# Altium PCB PCB1.PcbDoc
Units mm, origin at the board's own origin, x right, y up, seen from the top; angles counter-clockwise.
Board outline 97.5 x 97.5 mm, 2 copper layers (Top Layer, Bottom Layer); 67 components, 71 nets, 269 pads, 55 vias.
Unrouted connection lines stored in the file: 4.
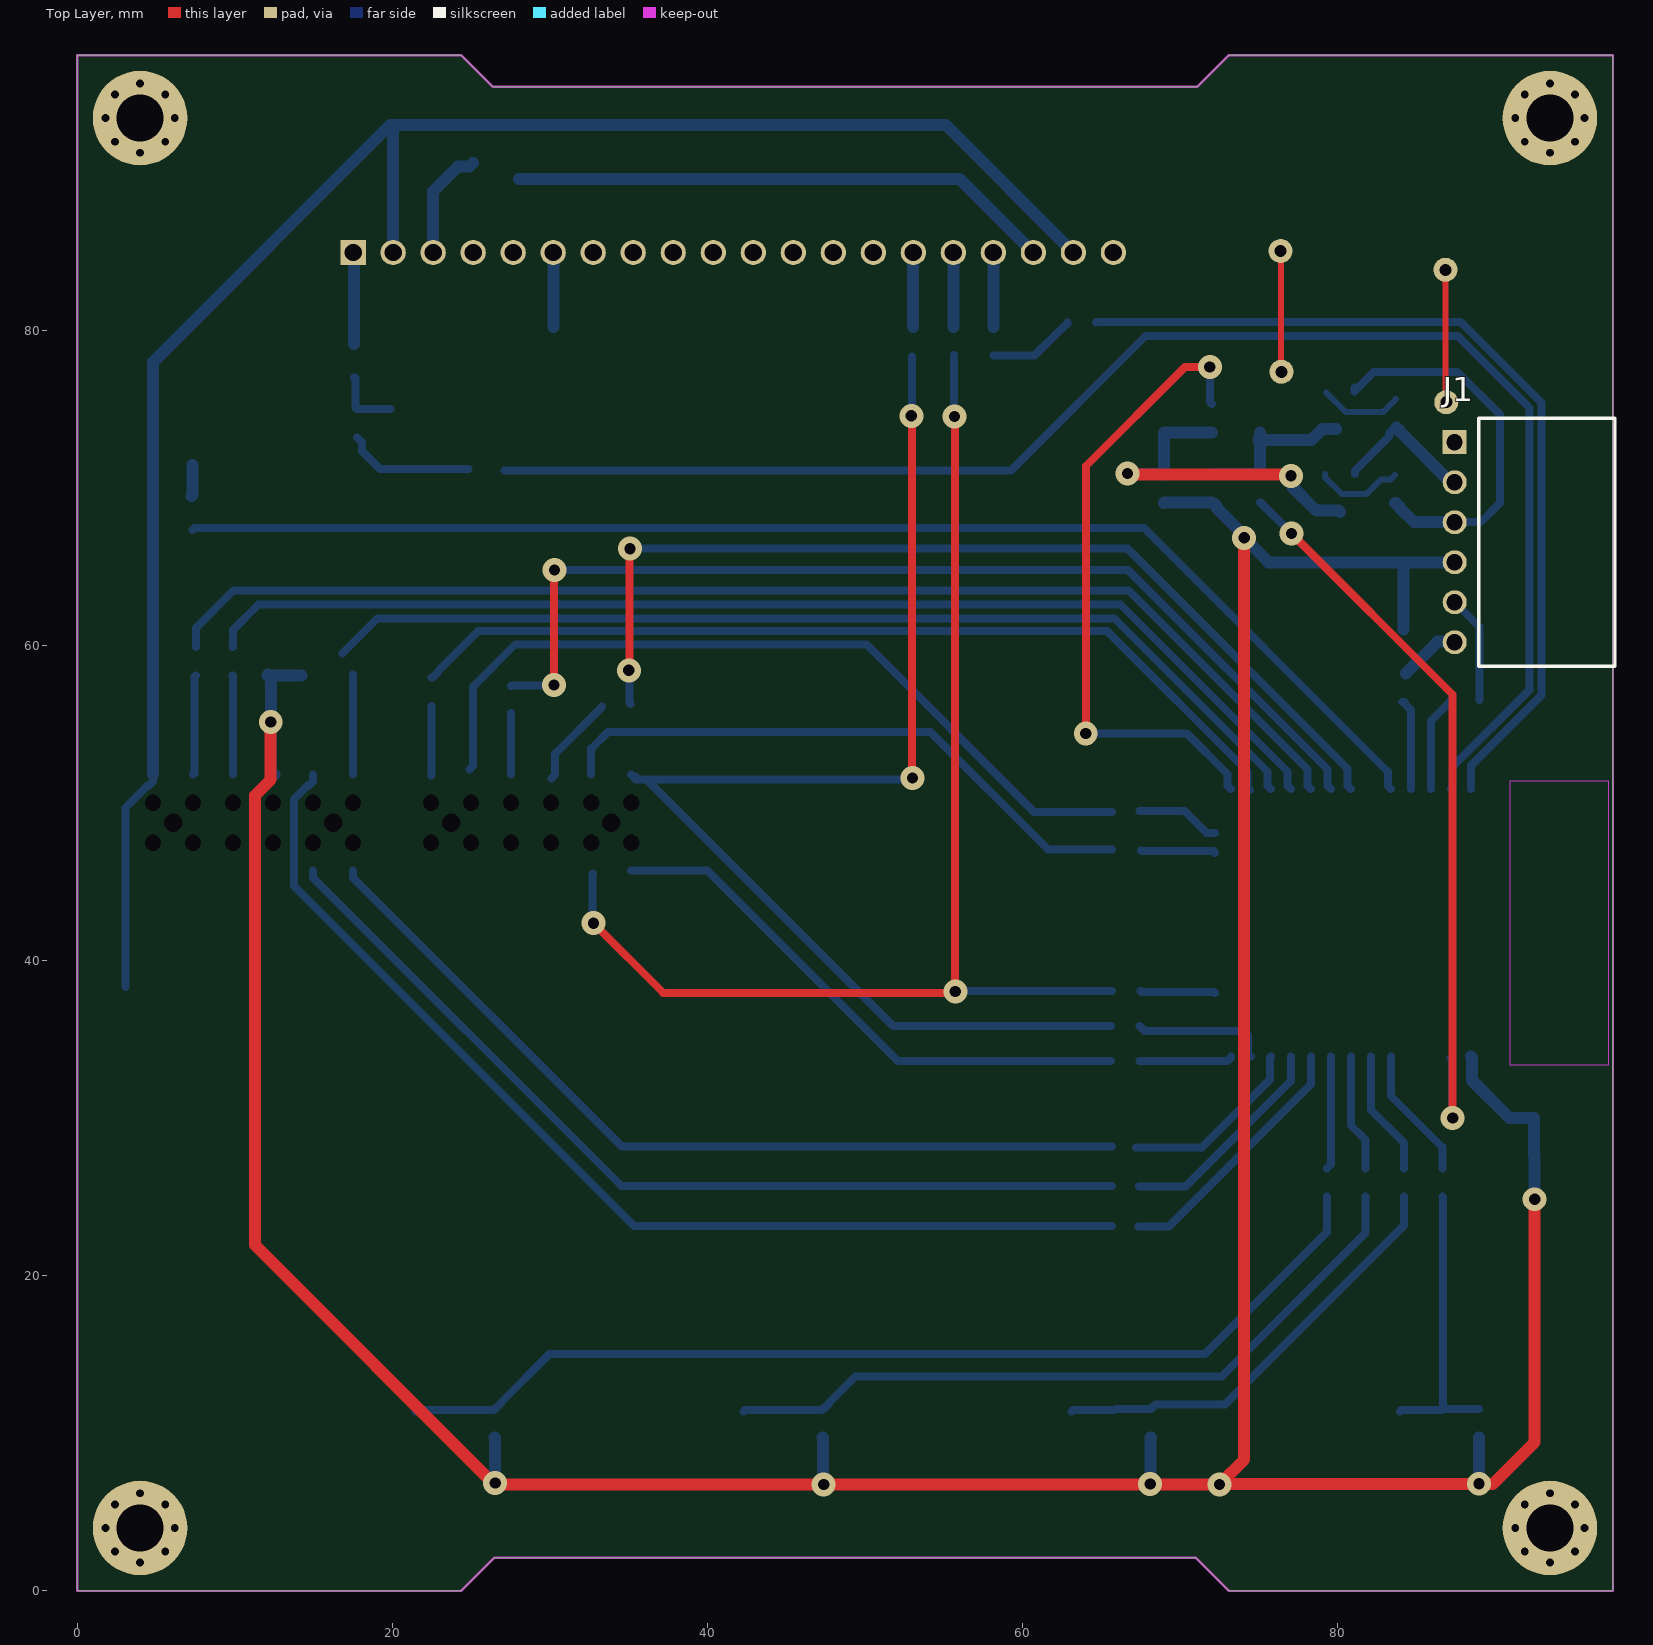
[diagram p0: Top Layer view]
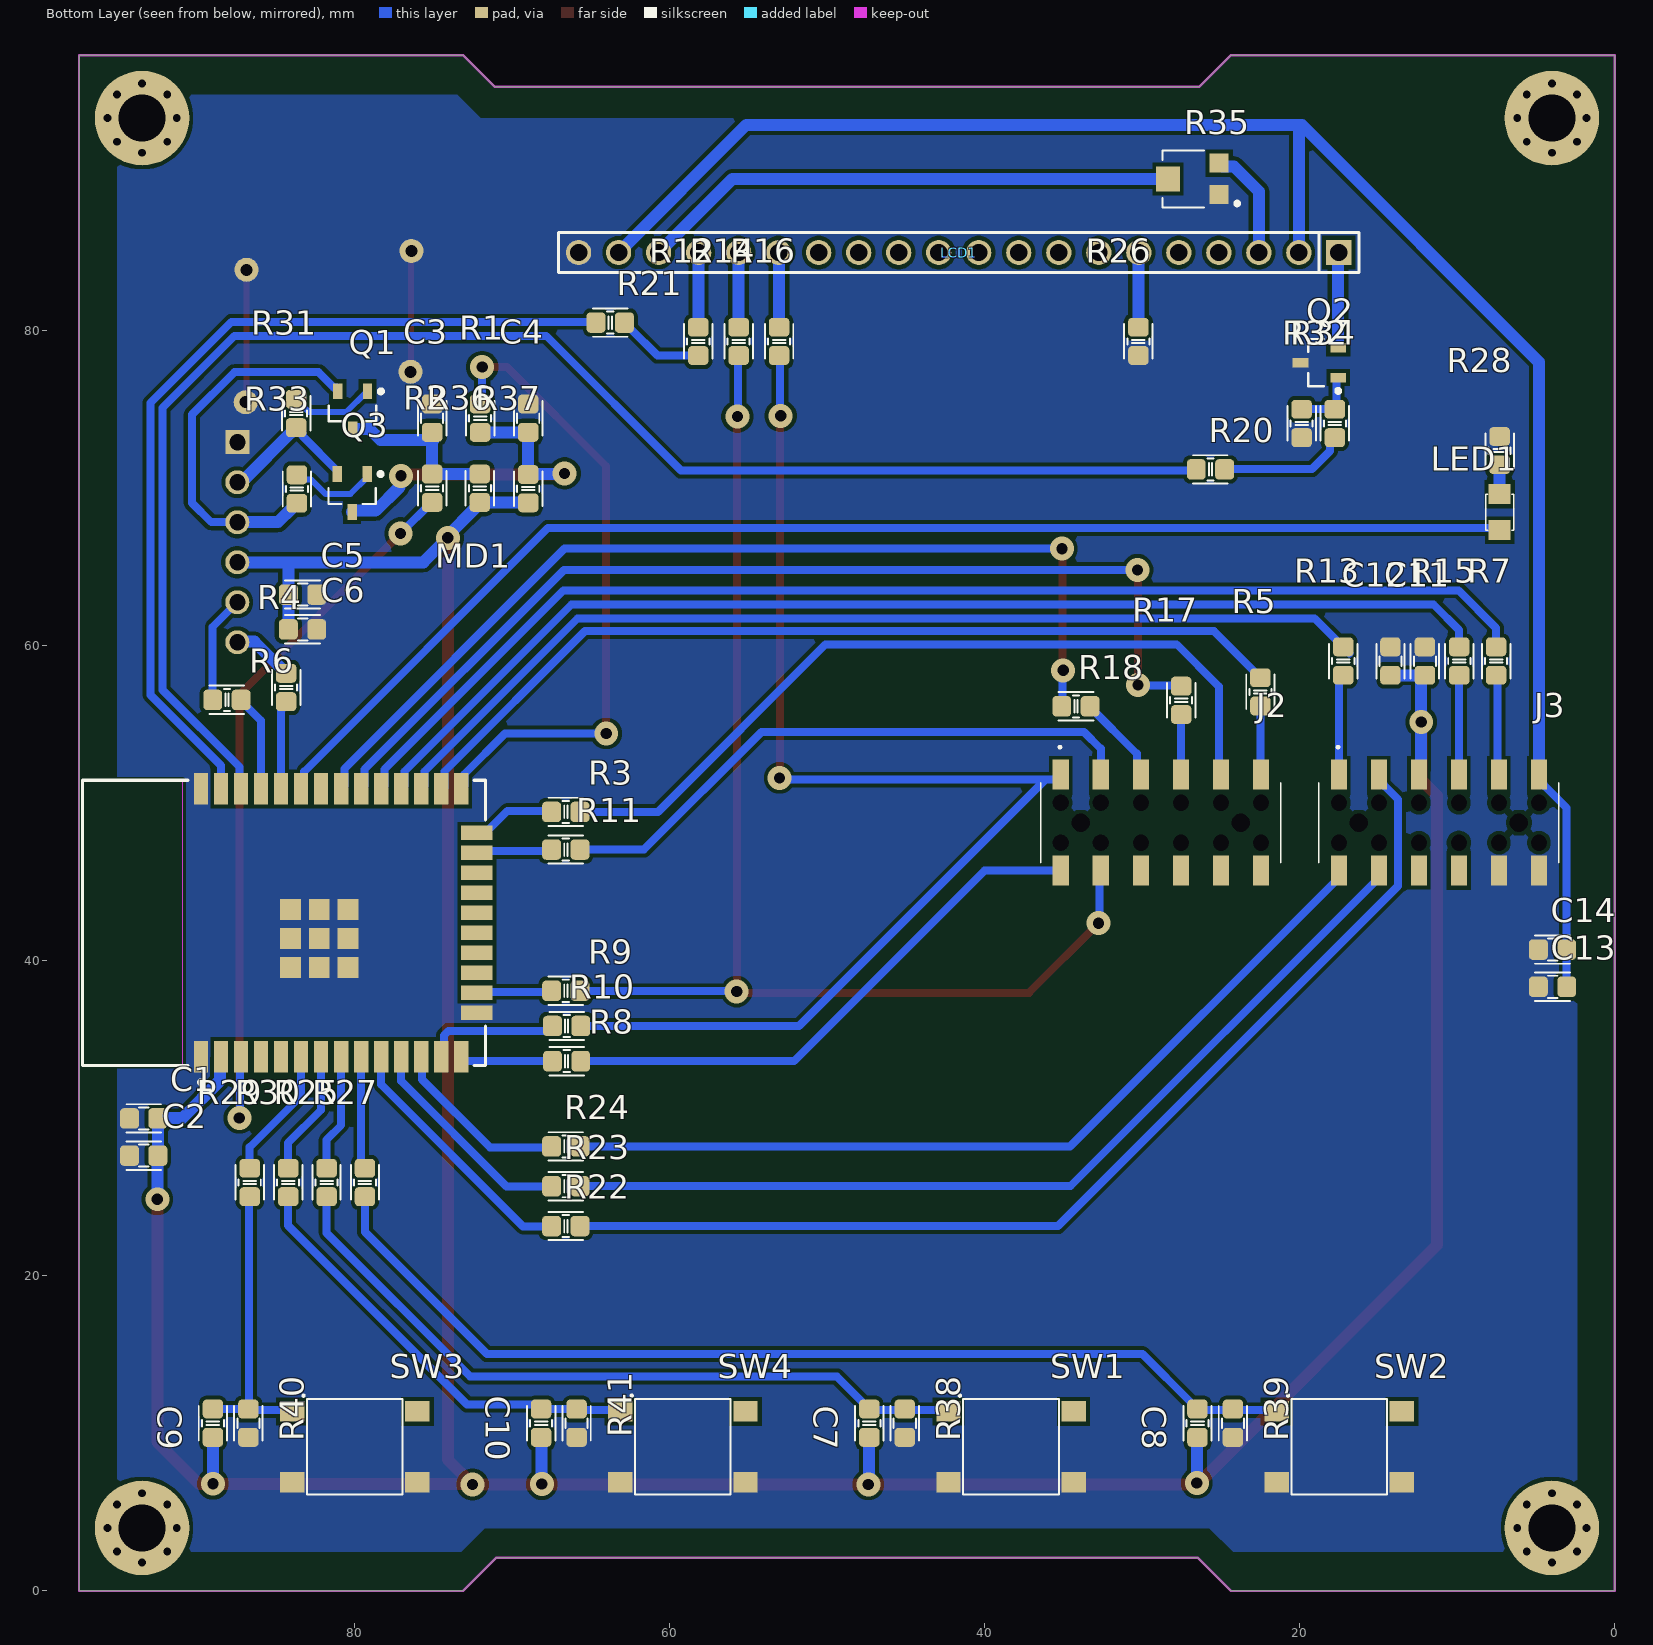
[diagram p1: Bottom Layer view, seen from below]
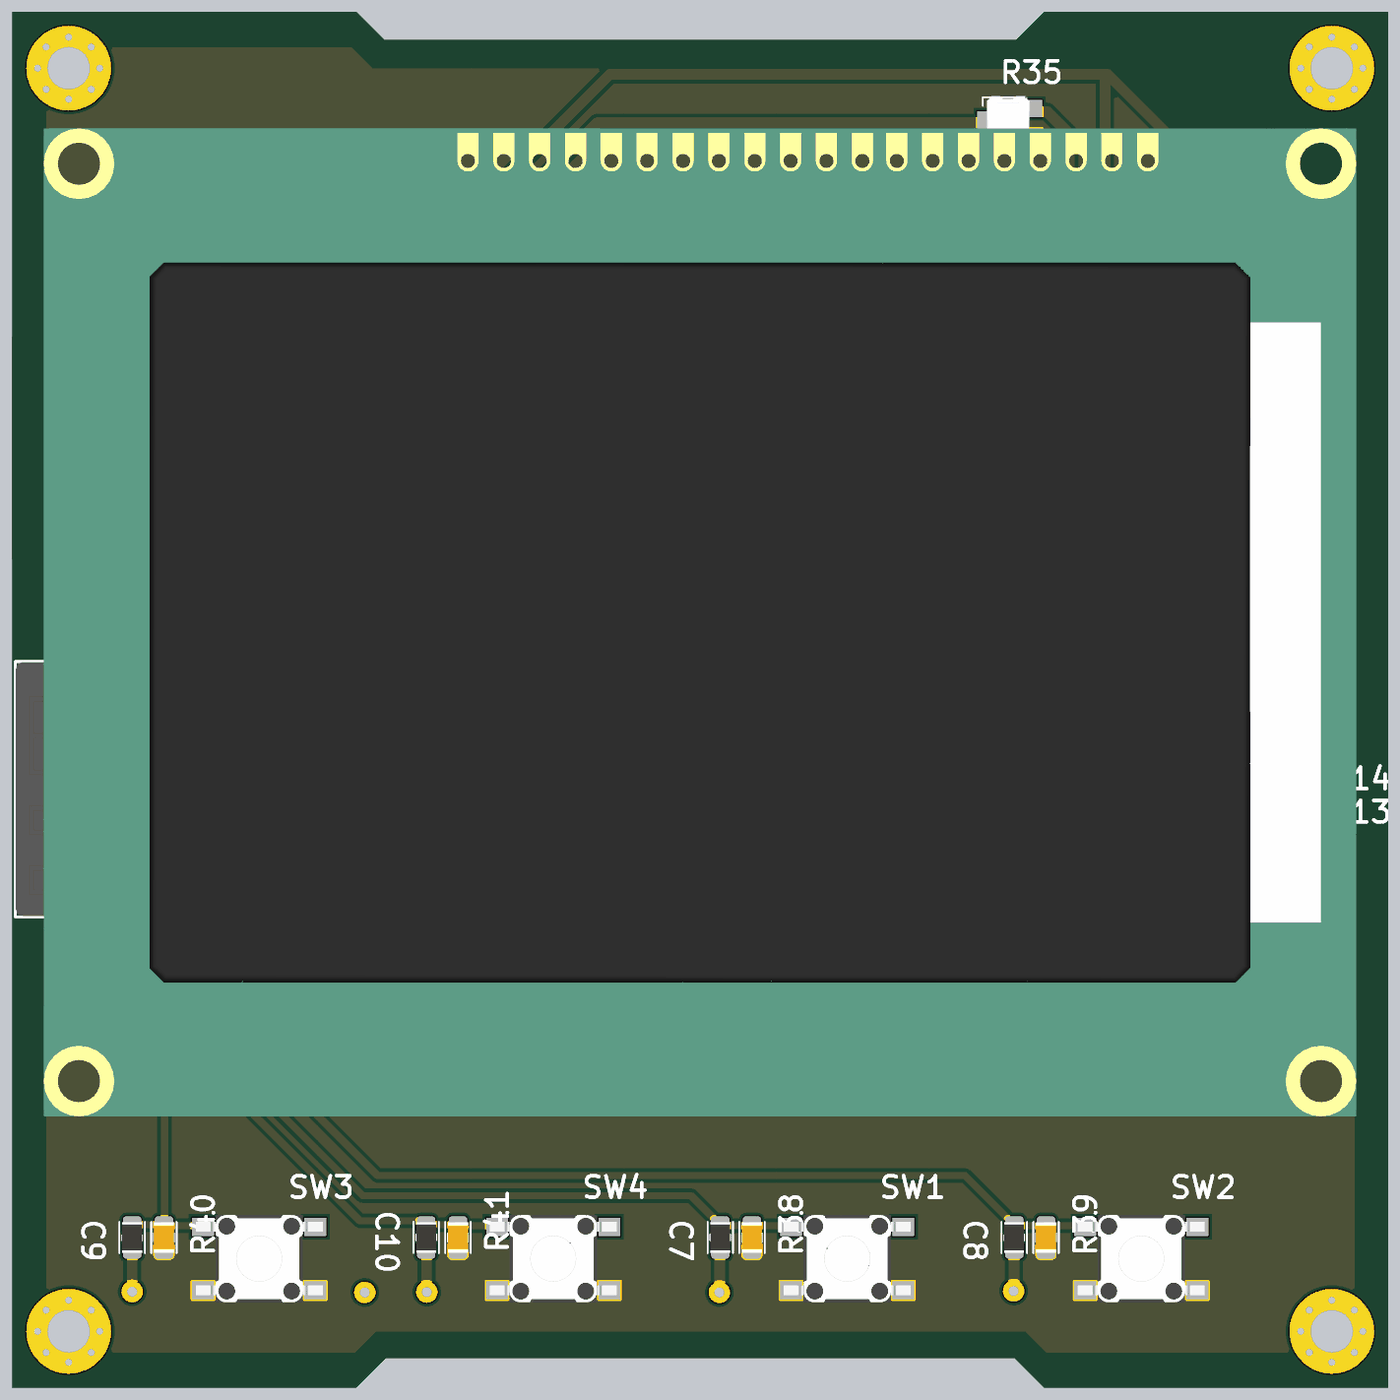
[diagram p2: 3D render of the assembled board from below, using the file's embedded part models]

## Layer stack, top to bottom
Top Solder: solder mask 0.0102, Solder Resist, Dk 3.5
Top Layer: signal copper 0.0356
Dielectric 1: dielectric 0.32, FR-4, Dk 4.8
Bottom Layer: signal copper 0.0356
Bottom Solder: solder mask 0.0102, Solder Resist, Dk 3.5

## Board outline
0,0 0,50 0,97.5 24.375,97.5 26.375,95.5 71.125,95.5 73.125,97.5 97.5,97.5 97.5,47.5 97.5,0 73.125,0 71.025,2.1 26.475,2.1 24.375,0

## Design rules (kind name [scope] priority, off if disabled: settings)
Clearance [All] p1: gap=0.254 ignorepadtopadclearanceinfootprint=FALSE
PolygonConnect [All] p1: connectstyle=Direct reliefconductorwidth=0.254 reliefentries=4 polygonreliefangle="90 Angle" airgapwidth=0.254
RoutingVias [All] p1: holewidth=0.711 width=1.27 viastyle="Through Hole" minholewidth=0.711 minwidth=1.27 maxholewidth=0.711 maxwidth=1.27
SolderMaskExpansion [All] p1: expansion=0.102 istentingtop=FALSE
SupplyNets "Schematic Supply Nets_2" [InNet('GND')] p1: voltage=0.000
SupplyNets "Schematic Supply Nets_1" [InNet('+3.3V')] p2: voltage=0.000
SupplyNets "Schematic Supply Nets" [InNet('+5V')] p3: voltage=0.000
Width [All] p1: maxlimit=1.27 minlimit=0.254 preferedwidth=0.508
30 further rules are at their usual default settings.

## Components (designator, comment, footprint, x,y, rotation, side; value= is the part's Value field where it differs from the comment)
C1 "4.7u/6.3V" CAP_C_2012X110 93.396,29.997 r180 bottom
C2 "0.1u/6.3V" CAP_C_2012X110 93.396,27.635 r180 bottom
C3 "0.1u/6.3V" CAP_C_2012X110 75.082,74.447 r270 bottom
C4 "0.1u/6.3V" CAP_C_2012X110 68.986,74.447 r270 bottom
C5 "10u/6.3V" CAP_C_2012X110 83.312,63.254 r0 bottom
C6 "0.1u/6.3V" CAP_C_2012X110 83.312,61.042 r0 bottom
C7 "0.1u/6.3V" CAP_C_2012X110 45.083,10.65 r90 bottom
C8 "0.1u/6.3V" CAP_C_2012X110 24.25,10.65 r90 bottom
C9 "0.1u/6.3V" CAP_C_2012X110 86.75,10.65 r90 bottom
C10 "0.1u/6.3V" CAP_C_2012X110 65.916,10.65 r90 bottom
C11 "10u/6.3V" CAP_C_2012X110 12.065,59.03 r270 bottom
C12 "0.1u/6.3V" CAP_C_2012X110 14.249,59.03 r270 bottom
C13 "10u/6.3V" CAP_C_2012X110 3.96,38.354 r180 bottom
C14 "0.1u/6.3V" CAP_C_2012X110 3.96,40.716 r180 bottom
J1 "JP6" JP6-C1C 87.452,66.573 r270 top
J2 "SSM-106-S-DV" SSM-106-XXX-DV-BE 28.829,48.768 r0 bottom
J3 "SSM-106-S-DV" SSM-106-XXX-DV-BE 11.176,48.768 r0 bottom
LCD1 "DISPLAY_LCDGRAP" LCD_GRAP_20PIN 48.768,54.229 r270 bottom locked
LED1 "LED" LED-0805-Blue 7.315,67.335 r90 bottom value="LED 3 - 5 ly 2 Colour"
MD1 "ESP32-WROOM-32" FP-ESP32-WROOM-32-MFG 84.49,42.415 r90 bottom
Q1 "BC817W" SOT95P237X112-3N 80.137,74.952 r270 bottom
Q2 "BC817W" SOT95P237X112-3N 18.767,77.978 r0 bottom
Q3 "BC817W" SOT95P237X112-3N 80.162,69.701 r270 bottom
R1 "33R/1%" RES_C_2012X65 72.034,74.447 r270 bottom
R2 "33R/1%" RES_C_2012X65 75.082,70.002 r90 bottom
R3 "33R/1%" RES_C_2012X65 66.599,49.454 r180 bottom
R4 "33R/1%" RES_C_2012X65 84.353,57.353 r90 bottom
R5 "33R/1%" RES_C_2012X65 22.504,57.074 r270 bottom
R6 "33R/1%" RES_C_2012X65 88.113,56.566 r0 bottom
R7 "33R/1%" RES_C_2012X65 7.544,59.03 r270 bottom
R8 "33R/1%" RES_C_2012X65 66.548,33.63 r180 bottom
R9 "33R/1%" RES_C_2012X65 66.599,38.1 r180 bottom
R10 "33R/1%" RES_C_2012X65 66.548,35.865 r180 bottom
R11 "33R/1%" RES_C_2012X65 66.599,47.066 r180 bottom
R12 "0R/1%" RES_C_2012X65 58.191,79.324 r270 bottom
R13 "33R/1%" RES_C_2012X65 17.247,59.03 r270 bottom
R14 "0R/1%" RES_C_2012X65 55.626,79.324 r270 bottom
R15 "33R/1%" RES_C_2012X65 9.881,59.03 r270 bottom
R16 "0R/1%" RES_C_2012X65 53.061,79.324 r270 bottom
R17 "33R/1%" RES_C_2012X65 27.534,56.54 r270 bottom
R18 "33R/1%" RES_C_2012X65 34.214,56.159 r180 bottom
R20 "33R/1%" RES_C_2012X65 25.679,71.196 r180 bottom
R21 "33R/1%" RES_C_2012X65 63.779,80.518 r180 bottom
R22 "33R/1%" RES_C_2012X65 66.599,23.165 r180 bottom
R23 "33R/1%" RES_C_2012X65 66.599,25.692 r180 bottom
R24 "33R/1%" RES_C_2012X65 66.599,28.219 r180 bottom
R25 "33R/1%" RES_C_2012X65 81.788,25.933 r270 bottom
R26 "0R/1%" RES_C_2012X65 30.251,79.324 r270 bottom
R27 "33R/1%" RES_C_2012X65 79.35,25.933 r270 bottom
R28 "750R/1%" RES_C_2012X65 7.315,72.39 r90 bottom
R29 "33R/1%" RES_C_2012X65 86.665,25.933 r270 bottom
R30 "33R/1%" RES_C_2012X65 84.226,25.933 r270 bottom
R31 "10K/1%" RES_C_2012X65 83.718,74.752 r270 bottom
R32 "1K/1%" RES_C_2012X65 17.78,74.117 r90 bottom
R33 "10K/1%" RES_C_2012X65 83.668,69.952 r90 bottom
R34 "5.1K/1%" RES_C_2012X65 19.888,74.117 r90 bottom
R35 "20K" TRIM_TC33X-2-103E 26.924,89.637 r0 bottom
R36 "5.1K/1%" RES_C_2012X65 72.06,70.002 r270 bottom
R37 "5.1K/1%" RES_C_2012X65 68.986,69.977 r270 bottom
R38 "5.1K/1%" RES_C_2012X65 47.333,10.65 r270 bottom
R39 "5.1K/1%" RES_C_2012X65 26.5,10.65 r270 bottom
R40 "5.1K/1%" RES_C_2012X65 89,10.65 r270 bottom
R41 "5.1K/1%" RES_C_2012X65 68.167,10.65 r270 bottom
SW1 "" SW2-SMD 38.333,9.15 r180 bottom value="SW chip 2 pin"
SW2 "" SW2-SMD 17.5,9.15 r180 bottom value="SW chip 2 pin"
SW3 "" SW2-SMD 80,9.15 r180 bottom value="SW chip 2 pin"
SW4 "" SW2-SMD 59.167,9.15 r180 bottom value="SW chip 2 pin"

## Footprints (in the part's own frame and the unit in brackets; to place one, negate y for a bottom-side part, rotate by r counter-clockwise, add the part's x,y. Pads: shape width x height; smd on the part's side, far side on the other; paste and mask are expansions set on the pad)
CAP_C_2012X110 [mm] "Chip Capacitor, 2-Leads, Body 2.00x1.25mm, IPC High Density"
  rrect41% 1.2x1.3 smd: 1(-0.9,0) 2(0.9,0)
  silkscreen extent -1.1,-0.9 1.1,0.9, body extent -1.1,-0.72 1.1,0.72, height 1.1
FP-ESP32-WROOM-32-MFG [mm]
  rect 2x0.9 smd paste+0 mask+0: 1(-8.5,5.26) 2(-8.5,3.99) 3(-8.5,2.72) 4(-8.5,1.45) 5(-8.5,0.18) 6(-8.5,-1.09) 7(-8.5,-2.36) 8(-8.5,-3.63) 9(-8.5,-4.9) 10(-8.5,-6.17) 11(-8.5,-7.44) 12(-8.5,-8.71) 13(-8.5,-9.98) 14(-8.5,-11.25) 25(8.5,-11.25) 26(8.5,-9.98) 27(8.5,-8.71) 28(8.5,-7.44) 29(8.5,-6.17) 30(8.5,-4.9) 31(8.5,-3.63) 32(8.5,-2.36) 33(8.5,-1.09) 34(8.5,0.18) 35(8.5,1.45) 36(8.5,2.72) 37(8.5,3.99) 38(8.5,5.26)
  rect 0.9x2 smd paste+0 mask+0: 15(-5.715,-12.25) 16(-4.445,-12.25) 17(-3.175,-12.25) 18(-1.905,-12.25) 19(-0.635,-12.25) 20(0.635,-12.25) 21(1.905,-12.25) 22(3.175,-12.25) 23(4.445,-12.25) 24(5.715,-12.25)
  rect 1.33x1.33 smd paste+0 mask+0: 39(-2.835,-4.075) 39(-2.835,-2.24) 39(-2.835,-0.405) 39(-1,-4.075) 39(-1,-2.24) 39(-1,-0.405) 39(0.835,-4.075) 39(0.835,-2.24) 39(0.835,-0.405)
  Keep-Out Layer region: -9,12.75 9,12.75 9,6.45 -9,6.45
  Keep-Out Layer region: -9,12.75 9,12.75 9,6.45 -9,6.45
  silkscreen extent -10.25,-12.8 9.05,12.8, body extent -9,-12.75 9,12.75, height 3.2
JP6-C1C [mm] "06p 1 row Right angle"
  rect 1.52x1.52 hole 1.02: 1(-6.35,0)
  round 1.52 hole 1.02: 2(-3.81,0) 3(-1.27,0) 4(1.27,0) 5(3.81,0) 6(6.35,0)
  silkscreen extent -7.87,1.52 7.87,10.17, body extent -7.87,-0.21 7.87,10.09, height 2.51
LCD_GRAP_20PIN [mm]
  rect 1.6x1.6 hole 1.1: 1(-30.734,31.242)
  round 1.6 hole 1.1: 2(-30.734,28.702) 3(-30.734,26.162) 4(-30.734,23.622) 5(-30.734,21.082) 6(-30.734,18.542) 7(-30.734,16.002) 8(-30.734,13.462) 9(-30.734,10.922) 10(-30.734,8.382) 11(-30.734,5.842) 12(-30.734,3.302) 13(-30.734,0.762) 14(-30.734,-1.778) 15(-30.734,-4.318) 16(-30.734,-6.858) 17(-30.734,-9.398) 18(-30.734,-11.938) 19(-30.734,-14.478) 20(-30.734,-17.018)
  silkscreen extent -32,-18.29 -29.46,32.51, body extent -35,-46.5 35,46.5, height 21.2
LED-0805-Blue [mil]
  rect 50x55 smd: 1(0,0) 2(90,0)
  silkscreen extent 0,-35 90,35, body extent 5,-25 85,25, height 43
RES_C_2012X65 [mm] "Chip Resistor, 2-Leads, Body 2.00x1.25mm, IPC High Density"
  rrect41% 1.2x1.3 smd: 1(-0.9,0) 2(0.9,0)
  silkscreen extent -1.1,-0.9 1.1,0.9, body extent -1.07,-0.7 1.07,0.7, height 0.65
SOT95P237X112-3N [mm] "SOT23, 3-Leads, Body 2.92x2.37mm, Pitch 0.95mm, IPC Medium Density"
  rect 1x0.6 smd: 1(-1.2,0.95) 2(-1.2,-0.95) 3(1.2,0)
  silkscreen extent -1.32,-1.5 0.7,1.92, body extent -1.32,-1.52 1.32,1.52, height 1.12
SSM-106-XXX-DV-BE [mm]
  rect 1.02x1.905 smd: 1(6.35,-3.047) 2(6.35,3.047) 3(3.81,-3.047) 4(3.81,3.047) 5(1.27,-3.047) 6(1.27,3.047) 7(-1.27,-3.047) 8(-1.27,3.047) 9(-3.81,-3.047) 10(-3.81,3.047) 11(-6.35,-3.047) 12(-6.35,3.047)
  round 0.585 hole 1.17 unplated: 13(5.08,0) 14(-5.08,0)
  round 0.51 hole 1.02 unplated: 13(6.35,-1.27) 14(6.35,1.27) 15(3.81,-1.27) 16(3.81,1.27) 17(1.27,-1.27) 18(1.27,1.27) 19(-1.27,-1.27) 20(-1.27,1.27) 21(-3.81,-1.27) 22(-3.81,1.27) 23(-6.35,-1.27) 24(-6.35,1.27)
  silkscreen extent -7.62,-4.85 7.62,2.54, body extent -7.62,-3.52 7.62,3.52, height 7.5
SW2-SMD [mm] "6*6mm vertical type, SMD, height 5.0mm, black actuator, 160gf, T&R"
  rect 1.55x1.3 smd: 1(-3.975,2.25) 1(3.975,2.25) 2(-3.975,-2.25) 2(3.975,-2.25)
  silkscreen extent -3.29,-3.04 3.04,3.29, body extent -4.5,-3.1 4.5,3.1, height 4.99
TRIM_TC33X-2-103E [mm]
  rect 1.2x1.2 smd: 1(-1.8,1) 3(-1.8,-1)
  rect 1.5x1.6 smd: 2(1.45,0)
  silkscreen extent -3.07,-1.8 1.8,1.8, body extent -1.5,-1.9 1.5,1.9, height 1.1

## Part data
C1 C2 C3 C4 C5 C6 C7 C8 C9 C10 C11 C12 C13 C14: library part CAP_SMD
J1: "WR-PHD 2.54 mm Angled Socket Header", Manufacturer="W¨¹rth Elektronik eiSos GmbH", PartNo=613006143121, ComponentLink1 Description=Manufacturer, ComponentLink1URL=http://www.we-online.com, ComponentLink2 Description=Datasheet, ComponentLink2URL=http://katalog.we-online.de/em/datasheet/6130xx143121.pdf, Created by="Karrer Zheng", Created Date="29 March 2013", NoPins=06
J2 J3: "Connector", Arrow Part Number=SSM-105-S-DV, Manufacturer_Name=SAMTEC, Mouser Part Number=200-SSM105SDV, Arrow Price/Stock=https://www.arrow.com/en/products/ssm-105-s-dv/samtec, Datasheet Link=https://mm.digikey.com/Volume0/opasdata/d220001/medias/docus/6129/ssm-1xx-xxx-dv-xx-xx-xxx-x-xx-mkt.pdf, Manufacturer_Part_Number=SSM-105-S-DV, Mouser Price/Stock=https://www.mouser.co.uk/ProductDetail/Samtec/SSM-105-S-DV?qs=XtX6y9BSeMiNY1vJI%2FFCQQ%3D%3D
LCD1: "Display 128x64pixel", Manufacturer="Newhaven Display", Manufacturer Part Number=NHD-12864AZ-NSW-BBW-TR, Supplier Part Number=NHD-12864AZ-NSW-BBW-TR-ND, Category="LCD, OLED, Graphic Displays", ComponentLink1Description=https://datasheet.ciiva.com:443/pdfs/VipMasterIC/IC/NWAL/NWALS00082/NWALS00082-1.pdf?src-supplier=IHS+Markit, ComponentLink1URL=https://datasheet.ciiva.com:443/pdfs/VipMasterIC/IC/NWAL/NWALS00082/NWALS00082-1.pdf?src-supplier=IHS+Markit, ComponentLink2Description=https://datasheet.ciiva.com/2102/nhd-12864az-nsw-bbw-tr-2102907.pdf?src-supplier=Digikey, ComponentLink2URL=https://datasheet.ciiva.com/2102/nhd-12864az-nsw-bbw-tr-2102907.pdf?src-supplier=Digikey, ComponentLink3Description=https://datasheet.ciiva.com/16231/nhd-12864az-nsw-bbw-tr-16231892.pdf?src-supplier=Onlinecomponents.com, ComponentLink3URL=https://datasheet.ciiva.com/16231/nhd-12864az-nsw-bbw-tr-16231892.pdf?src-supplier=Onlinecomponents.com, ComponentLink4Description=https://datasheet.ciiva.com/5326/nhd-12864az-nsw-bbw-tr-52487-5326437.pdf?src-supplier=Mouser, ComponentLink4URL=https://datasheet.ciiva.com/5326/nhd-12864az-nsw-bbw-tr-52487-5326437.pdf?src-supplier=Mouser, ComponentLink5Description=https://datasheet.ciiva.com/30204/nhd-12864az-nsw-bbw-tr-30204634.pdf?src-supplier=Onlinecomponents.com, ComponentLink5URL=https://datasheet.ciiva.com/30204/nhd-12864az-nsw-bbw-tr-30204634.pdf?src-supplier=Onlinecomponents.com, Pricing="1=31,34, 5=29,46, 10=27,579, 50=26,0124, 100=24,7588, 250=23,50516 (USD)", RoHS=No, Stock=303, Supplier=Digikey
LED1: library part "LED SMD"
MD1: library part CMP-194065-000008-1, "RX TXRX MOD WIFI SURFACE MOUNT", Case/Package=SMD/SMT, Frequency=2.5GHz, Max Operating Temperature=85°C, Min Operating Temperature=-40°C, Operating Supply Voltage=3.6V, Package Quantity=550, Data Rate=150Mbps, Mount="Surface Mount", Packaging="Cut Tape", Sensitivity=-98dBm, Weight=0.088185oz
Q1 Q2 Q3: library part BJT_NPN
R1 R2 R3 R4 R5 R6 R7 R8 R9 R10 R11 R12 R13 R14 R15 R16 R17 R18 R20 R21 R22 R23 R24 R25 R26 R27 R28 R29 R30 R31 R32 R33 R34 R36 R37 R38 R39 R40 R41: library part Res-SMD, "Resistor", Manufacturer="Generic Components", Class=Passive, Published=08/06/2000, Publisher="Altium Hobart Technology Centre"
R35: library part TC33X-2-103E, "10 kOhms 0.1W, 1/10W J Lead Surface Mount Trimmer Potentiometer Cermet 1 Turn Top Adjustment", Package="SOD-23 Bourns", Check_prices=https://www.snapeda.com/parts/TC33X-2-103E/Bourns/view-part/47092/?ref=eda, Digi-Key_Part_Number=TC33X-103ECT-ND, MF=Bourns, MP=TC33X-2-103E, Purchase-URL=https://pricing.snapeda.com/search/part/TC33X-2-103E/?ref=eda, SnapEDA_Link=https://www.snapeda.com/parts/TC33X-2-103E/Bourns/view-part/47092/?ref=snap
SW1 SW2 SW3 SW4: library part SW2, "Switch button 2 pin"

## Free pads (board coordinates)
  round 6 hole 3: 2(4,4) 2(4,93.5) 2(93.5,4) 2(93.5,93.5)
  round 1.524 hole 0.762: 3(76.454,77.394) 4(76.403,85.065) 6(86.919,75.463) 7(86.868,83.871)

## Via types
v1: diameter 1.52, hole 0.5, Top Layer to Bottom Layer, 32 vias
v2: diameter 1.52, hole 0.711, Top Layer to Bottom Layer, 23 vias

## Nets (pads, with @x,y where several pads share a name; then routed paths per layer and width w, separated by ;. In a path a pad name is that pad's centre, name@x,y a point inside that pad or via, vN(x,y) a via of type N, cw(c..) or ccw(c..) an arc to the next point about the centre after c; other vN are vias at no path point)
+3.3V: C1.2 C2.2 C5.2 C6.2 C11.2 C12.2 J1.4 J3.5 MD1.2 R36.2 R37.2 R38.2 R39.2 R40.2 R41.2 | length 255
  Top Layer w0.762: v2(12.294,55.169) 12.294,51.505 11.301,50.512 11.301,21.948 v2@26.492,6.756 ; v2(26.543,6.858) 26.492,6.807 v2@26.492,6.756 ; v2(74.092,66.853) 74.092,8.331 v2(72.517,6.756) ; v2(92.532,24.867) 92.532,9.449 89.865,6.782 89.002,6.782 72.542,6.782 v2(72.517,6.756) ; v2@26.492,6.756 v2(47.396,6.756) 68.123,6.756 v2(72.517,6.756)
  Bottom Layer w0.762: C11.2@12.1,58.13 12.319,57.911 v2@12.319,55.169 ; C11.2@12.116,58.191 12.178,58.13 C12.2 ; v2(12.294,55.169) v2@12.319,55.169 ; J3.5@12.548,51.816 12.319,52.045 v2@12.319,55.169 ; R39.2@26.492,9.728 26.521,9.699 26.521,6.88 v2(26.543,6.858) ; R38.2 47.365,9.718 47.365,6.788 v2(47.396,6.756) ; v2(68.123,6.782) 68.145,6.804 68.145,9.728 R41.2 ; R37.2 68.999,69.09 R36.2@72.047,69.09 ; R36.2@72.175,69.037 72.329,68.883 72.329,68.768 v2@74.168,66.929 ; v2(74.092,66.853) 75.641,65.303 84.226,65.303 ; C6.2 C5.2 84.212,65.289 84.226,65.303 ; J1.4 84.226,65.303 ; MD1.2 88.549,33.846 88.549,32.406 90.946,30.008 C1.2@92.485,30.008 ; v2(89.002,6.807) R40.2@89.001,9.749 ; C1.2 C2.2 92.514,27.617 92.514,24.885 v2(92.532,24.867)
+5V: C13.2 C14.2 J3.11 LCD1.2 LCD1.19 | length 116.6
  Bottom Layer w0.508: C13.2 C14.2 3.06,49.712 4.465,51.117 4.57,51.117 4.826,51.373 J3.11
  Bottom Layer w0.762: J3.11 4.826,78.014 19.877,93.066 20.066,93.066 ; LCD1.2 20.066,93.066 ; LCD1.19 55.143,93.066 20.066,93.066
CF1: J2.12
CF2: J2.10
CF3: J2.8
CF4: J2.6
DTR: J1.2 Q3.2 R31.2 | length 9.2
  Bottom Layer w0.508: Q3.2 81.112,71.101 83.322,73.311 83.322,73.506 83.668,73.852 R31.2
  Bottom Layer w0.762: R31.2@83.768,73.852 83.987,73.633 83.987,73.583 87.042,70.528 87.307,70.528 J1.2
ESP32_BOOT: C4.2 Q3.3 R1.2 R37.1 | length 22.9
  Top Layer w0.762: v2(66.675,70.942) 66.751,70.866 76.987,70.866 v2(77.064,70.79)
  Bottom Layer w0.762: v2(66.675,70.942) 66.708,70.91 68.954,70.91 R37.1 C4.2 R1.2 ; v2(77.064,70.79) 77.161,70.693 77.161,70.083 78.67,68.574 80.089,68.574 Q3.3
ESP32_EN: C3.2 Q1.3 R2.2 R36.1 | length 10.9
  Bottom Layer w0.762: R36.1 R2.2 C3.2 ; C3.2@75.006,73.065 78.348,73.065 79.035,73.752 Q1.3@79.908,73.752
ESP32_RX: J1.6 R4.2 | length 4
  Bottom Layer w0.762: R4.2 86.367,60.267 87.409,60.267 J1.6
ESP32_TX: J1.5 R6.2 | length 6.8
  Bottom Layer w0.508: J1.5 89.013,61.203 R6.2
GND: C1.1 C2.1 C3.1 C4.1 C5.1 C6.1 C7.1 C8.1 C9.1 C10.1 C11.1 C12.1 C13.1 C14.1 J1.1 J3.10 J3.12 LCD1.20 MD1.1 MD1.15 MD1.38 MD1.39 pad.3 pad.4 pad.6 pad.7 Q2.3 R26.2 R28.2 R34.1 R35.1 SW1.2 SW2.2 SW3.2 SW4.2 | length 16.2
  Top Layer w0.381: pad.3 76.416,77.483 76.416,85.052 pad.4@76.505,85.141 ; pad.6@86.817,75.438 86.868,75.489 86.868,83.845 pad.7
IRQ0: J2.11 R5.2 | length 4.4
  Bottom Layer w0.508: J2.11@22.454,51.765 22.492,51.803 22.492,56.161 R5.2
IRQ1: J2.9 R3.2 | length 51.4
  Bottom Layer w0.508: J2.9@24.917,52.156 25.146,52.385 25.146,57.421 27.821,60.096 50.114,60.096 60.756,49.454 R3.2
Key0: C9.2 R29.2 R40.1 SW3.1 | length 18.6
  Bottom Layer w0.508: SW3.1@83.975,11.4 84.05,11.475 86.675,11.475 C9.2 ; R29.2 86.707,24.991 86.707,11.593 C9.2 ; R40.1 C9.2
Key1: C10.2 R30.2 R41.1 SW4.1 | length 27.8
  Bottom Layer w0.508: SW4.1@63.142,11.4 63.217,11.475 65.842,11.475 C10.2 R41.1 68.444,11.828 72.864,11.828 84.226,23.19 R30.2
Key2: C7.2 R25.2 R38.1 SW1.1 | length 46.5
  Bottom Layer w0.508: SW1.1@42.308,11.4 42.383,11.475 45.083,11.475 47.258,11.475 R38.1 47.383,11.55 47.729,11.896 47.729,11.946 49.398,13.614 72.669,13.614 81.788,22.733 R25.2
Key3: C8.2 R27.2 R39.1 SW2.1 | length 64.9
  Bottom Layer w0.508: SW2.1@21.475,11.4 21.55,11.475 24.25,11.475 26.425,11.475 R39.1 26.55,11.55 26.896,11.896 26.896,11.946 29.987,15.037 71.603,15.037 79.349,22.784 R27.2
LCD_BL: R20.2 R32.1 | length 8.2
  Bottom Layer w0.508: R32.1 18.089,72.909 18.089,72.361 19.228,71.222 R20.2@24.848,71.222
LCD_BL_K: LCD1.1 Q2.2 | length 5.8
  Bottom Layer w0.508: LCD1.1 LCD1.1@17.567,84.922
  Bottom Layer w0.762: Q2.2@17.567,79.146 LCD1.1@17.567,84.922
LCD_SS: R12.2 R21.2 | length 5.6
  Bottom Layer w0.508: R12.2 60.785,78.424 62.483,80.122 62.533,80.122 62.879,80.468 R21.2
LCD_V0: LCD1.18 R35.2 | length 34.6
  Bottom Layer w0.762: R35.2@28.049,89.637 56.032,89.637 LCD1.18
LCD_VOUT: LCD1.3 R35.3 | length 7.1
  Bottom Layer w0.762: LCD1.3 22.606,88.849 24.174,90.418 24.905,90.418 R35.3
LED: LED1.1 MD1.33 | length 83.5
  Bottom Layer w0.508: LED1.1 7.468,67.488 67.726,67.488 83.204,52.009 83.204,51.111 MD1.33
MISO: J2.2 R8.2 | length 35.5
  Bottom Layer w0.508: J2.2 40.03,45.721 52.121,33.63 R8.2
MOSI: J2.4 R9.2 R14.2 | length 78.4
  Top Layer w0.508: v2(32.791,42.393) 37.211,37.973 55.677,37.973 v2(55.753,38.049) 55.728,38.075 55.728,74.524 v2(55.702,74.549)
  Bottom Layer w0.508: J2.4@32.741,45.542 32.715,45.517 32.715,42.469 v2(32.791,42.393) ; R14.2@55.677,78.461 55.664,78.448 55.664,74.587 v2(55.702,74.549) ; v2(55.753,38.049) 55.778,38.075 65.673,38.075 R9.2
NetLCD1_6: LCD1.6 R26.1 | length 4.7
  Bottom Layer w0.508: LCD1.6 LCD1.6@30.239,84.95 ; R26.1@30.239,80.237 R26.1
  Bottom Layer w0.762: R26.1@30.239,80.237 LCD1.6@30.239,84.95
NetLCD1_15: LCD1.15 R16.1 | length 4.7
  Bottom Layer w0.762: R16.1 53.073,80.237 53.073,84.95 LCD1.15
NetLCD1_16: LCD1.16 R14.1 | length 4.7
  Bottom Layer w0.762: R14.1 LCD1.16
NetLCD1_17: LCD1.17 R12.1 | length 4.7
  Bottom Layer w0.762: LCD1.17 58.179,84.95 58.179,80.237 R12.1
NetLED1_2: LED1.2 R28.1 | length 2
  Bottom Layer w0.762: LED1.2@7.264,69.52 7.315,69.571 R28.1
NetMD1_3: MD1.3 R2.1 | length 48
  Top Layer w0.508: v2(77.089,67.132) 87.325,56.896 v2(87.325,30.023)
  Bottom Layer w0.508: R2.1 75.133,69.102 77.089,67.146 v2(77.089,67.132) ; MD1.3@87.198,33.833 87.268,33.763 87.268,30.08 v2(87.325,30.023)
NetMD1_6: MD1.6 R29.1 | length 8.4
  Bottom Layer w0.508: MD1.6 83.4,31.433 86.665,28.169 R29.1
NetMD1_7: MD1.7 R30.1 | length 7.9
  Bottom Layer w0.508: MD1.7 82.13,30.544 84.226,28.448 R30.1
NetMD1_8: MD1.8 R25.1 | length 7.5
  Bottom Layer w0.508: MD1.8 80.86,29.567 81.788,28.639 R25.1
NetMD1_9: MD1.9 R27.1 | length 7.2
  Bottom Layer w0.508: R27.1 79.59,27.074 MD1.9
NetMD1_10: MD1.10 R22.1 | length 16.4
  Bottom Layer w0.508: R22.1@67.391,23.139 69.317,23.139 78.32,32.143 MD1.10
NetMD1_11: MD1.11 R23.1 | length 14
  Bottom Layer w0.508: R23.1@67.415,25.679 70.358,25.679 77.05,32.371 MD1.11
NetMD1_12: MD1.12 R24.1 | length 11.8
  Bottom Layer w0.508: R24.1@67.234,28.143 71.399,28.143 75.72,32.464 75.72,33.855 MD1.12
NetMD1_13: MD1.13 R10.1 | length 8.6
  Bottom Layer w0.508: R10.1 67.753,35.56 74.048,35.56 74.346,35.262 74.346,34.079 MD1.13
NetMD1_14: MD1.14 R8.1 | length 6
  Bottom Layer w0.508: R8.1 73.044,33.63 73.24,33.826 MD1.14
NetMD1_16: MD1.16 R9.1 | length 4.8
  Bottom Layer w0.508: R9.1 67.564,38.035 72.175,38.035 MD1.16
NetMD1_23: MD1.23 R11.1 | length 4.8
  Bottom Layer w0.508: R11.1@67.539,47.015 67.591,46.963 72.137,46.963 MD1.23
NetMD1_24: MD1.24 R3.1 | length 5.4
  Bottom Layer w0.508: R3.1@67.437,49.505 70.315,49.505 71.69,48.13 MD1.24
NetMD1_25: MD1.25 R1.1 | length 40.9
  Top Layer w0.508: v2(64.033,54.432) 64.033,71.399 70.333,77.699 v2(71.907,77.699)
  Bottom Layer w0.508: v2(64.033,54.432) 70.46,54.432 73.044,51.848 73.044,51.111 MD1.25 ; v2(71.907,77.699) 71.907,75.474 R1.1
NetMD1_26: MD1.26 R5.1 | length 58
  Bottom Layer w0.508: R5.1 22.554,57.974 22.9,58.32 22.9,58.37 25.465,60.935 65.389,60.935 74.314,52.009 74.314,50.984 MD1.26@74.447,50.851
NetMD1_27: MD1.27 R13.1 | length 64.9
  Bottom Layer w0.508: R13.1@16.843,59.526 19.064,61.747 65.846,61.747 75.584,52.009 75.584,51.111 MD1.27
NetMD1_28: MD1.28 R15.1 | length 74.3
  Bottom Layer w0.508: R15.1 9.889,59.938 9.889,60.994 11.506,62.611 66.252,62.611 76.854,52.009 76.854,51.111 MD1.28
NetMD1_29: MD1.29 R7.1 | length 78.8
  Bottom Layer w0.508: R7.1 7.544,61.138 9.931,63.525 66.751,63.525 78.124,52.153 78.124,51.111 MD1.29
NetMD1_30: MD1.30 R17.1 | length 65.7
  Top Layer w0.508: v2(30.277,57.506) 30.29,57.518 30.29,64.808 v2(30.302,64.821)
  Bottom Layer w0.508: R17.1 27.566,57.473 30.244,57.473 v2(30.277,57.506) ; v2(30.302,64.821) 66.711,64.821 79.394,52.138 79.394,51.111 MD1.30
NetMD1_31: MD1.31 R18.1 | length 62.6
  Top Layer w0.508: v2(35.027,58.445) 35.065,58.483 35.065,66.129 v2(35.103,66.167)
  Bottom Layer w0.508: v2(35.027,58.445) 35.07,58.402 35.07,56.37 R18.1@35.128,56.312 ; v2(35.103,66.167) 66.675,66.167 80.664,52.178 80.664,51.111 MD1.31
NetMD1_34: MD1.34 R4.1 | length 5.6
  Bottom Layer w0.508: R4.1@84.124,56.439 R4.1@84.262,56.439 ; R4.1@84.348,56.241 84.67,55.919 MD1.34
NetMD1_35: MD1.35 R6.1 | length 6.2
  Bottom Layer w0.508: MD1.35 85.94,55.243 87.213,56.516 R6.1
NetMD1_36: MD1.36 R20.1 | length 96.8
  Bottom Layer w0.508: R20.1@27.136,71.12 59.284,71.12 67.843,79.68 87.63,79.68 92.202,75.108 92.202,57.201 87.319,52.318 87.319,51.024 MD1.36
NetMD1_37: MD1.37 R21.1 | length 56.8
  Bottom Layer w0.508: R21.1 64.73,80.569 87.818,80.569 92.964,75.423 92.964,56.885 88.48,52.401 MD1.37
NetQ1_1: Q1.1 R31.1 | length 5.3
  Bottom Layer w0.381: Q1.1@79.299,76.073 80.518,74.854 82.92,74.854 83.259,75.192 83.259,75.21 83.7,75.652 R31.1
NetQ2_1: Q2.1 R32.2 R34.2 | length 4.2
  Bottom Layer w0.508: Q2.1 17.628,77.028 17.674,76.982 17.674,75.124 R32.2 R34.2
NetQ3_1: Q3.1 R33.2 | length 5.6
  Bottom Layer w0.381: Q3.1 79.212,70.701 80.267,69.647 81.864,69.647 82.786,70.568 83.385,70.568 R33.2
PM0: J2.7 R17.2 | length 3.9
  Bottom Layer w0.508: J2.7 R17.2@27.559,55.727
PM1: J2.5 R18.2 | length 5.9
  Bottom Layer w0.508: J2.5@30.124,51.587 30.355,51.818 30.355,53.151 33.314,56.11 R18.2
PPEM_CS: J2.3 R11.2 | length 38.2
  Bottom Layer w0.508: J2.3 32.639,53.467 33.706,54.534 54.178,54.534 61.646,47.066 R11.2
Relay: J3.9 R7.2 | length 6.4
  Bottom Layer w0.508: J3.9 7.455,51.904 7.455,58.041 R7.2
RS485_RE: J3.3 R22.2 | length 68.5
  Bottom Layer w0.508: J3.3 14.986,51.373 14.73,51.117 14.625,51.117 13.767,50.258 13.767,44.759 35.361,23.165 R22.2
RS485_RX: J3.7 R15.2 | length 6.3
  Bottom Layer w0.508: R15.2 9.893,58.117 9.893,51.828 J3.7
RS485_TX: J3.1 R13.2 | length 6.4
  Bottom Layer w0.508: J3.1 R13.2@17.526,58.189
RTS: J1.3 Q1.2 R33.1 | length 24.2
  Bottom Layer w0.508: Q1.2 81.087,76.352 81.133,76.398 81.333,76.398 82.304,77.368 87.637,77.368 90.322,74.683 90.322,69.063 89.103,67.843 J1.3@87.503,67.843
  Bottom Layer w0.762: R33.1 83.718,69.052 83.937,68.833 83.937,68.783 84.876,67.843 J1.3
SCK: J2.1 R10.2 R16.2 | length 80.8
  Top Layer w0.508: v2(52.959,74.6) 52.997,74.562 52.997,51.651 v2(53.035,51.613)
  Bottom Layer w0.508: J2.1 35.28,51.714 35.435,51.714 J2.1@35.435,51.553 ; J2.1@35.435,51.502 36.204,51.502 52.484,51.502 52.55,51.569 52.991,51.569 v2(53.035,51.613) ; 36.204,51.451 51.79,35.865 R10.2 ; v2(52.959,74.6) 53.01,74.651 R16.2@53.01,78.359
WarnOut: J3.2 R24.2 | length 55.7
  Bottom Layer w0.508: J3.2 17.526,45.278 34.584,28.22 R24.2
ZX0: J3.4 R23.2 | length 59.3
  Bottom Layer w0.508: J3.4 14.986,45.278 34.572,25.692 R23.2
ZX1: J3.8
ZX2: J3.6
pads on no net: J2.13 J2.14 J2.15 J2.16 J2.17 J2.18 J2.19 J2.20 J2.21 J2.22 J2.23 J2.24 J3.13 J3.14 J3.15 J3.16 J3.17 J3.18 J3.19 J3.20 J3.21 J3.22 J3.23 J3.24 LCD1.4 LCD1.5 LCD1.7 LCD1.8 LCD1.9 LCD1.10 LCD1.11 LCD1.12 LCD1.13 LCD1.14 MD1.4 MD1.5 MD1.17 MD1.18 MD1.19 MD1.20 MD1.21 MD1.22 MD1.32
copper on no net:
  other v1: 4,1.8 93.5,1.8 2.4,2.5 5.6,2.5 91.9,2.5 95.1,2.5 1.8,4 6.2,4 91.3,4 95.7,4 2.4,5.5 5.6,5.5 91.9,5.5 95.1,5.5 4,6.2 93.5,6.2 4,91.3 93.5,91.3 2.4,92 5.6,92 91.9,92 95.1,92 1.8,93.5 6.2,93.5 91.3,93.5 95.7,93.5 2.4,95 5.6,95 91.9,95 95.1,95 4,95.7 93.5,95.7

## Polygon pours and split planes (outlines as drawn)
GND on Bottom Layer "NONET_L-01_P-001" (solid, remove dead copper, pour order 0): 2.388,94.996 24.238,94.996 25.738,93.496 71.988,93.496 73.488,94.996 95.088,94.996 95.088,2.496 73.238,2.496 71.738,3.996 25.738,3.996 24.238,2.496 2.388,2.496

## Keep-outs
Keep-Out Layer:
  lines w0.15: 0,0 0,9.5 0,12 0,47.5 0,50 0,85.5 0,88 0,97.5 24.375,97.5 26.375,95.5 71.125,95.5 73.125,97.5 97.5,97.5 97.5,88 97.5,85.5 97.5,50 97.5,47.5 97.5,12 97.5,9.5 97.5,0 73.125,0 71.025,2.1 26.475,2.1 24.375,0 0,0